# Altium PCB NodeFPGA.PcbDoc
Units mm, origin at the board's own origin, x right, y up, seen from the top; angles counter-clockwise.
Board outline 25.4 x 47.62 mm, 2 copper layers (Top Layer, Bottom Layer), stack 1.671 mm thick; 58 components, 71 nets, 271 pads, 99 vias.
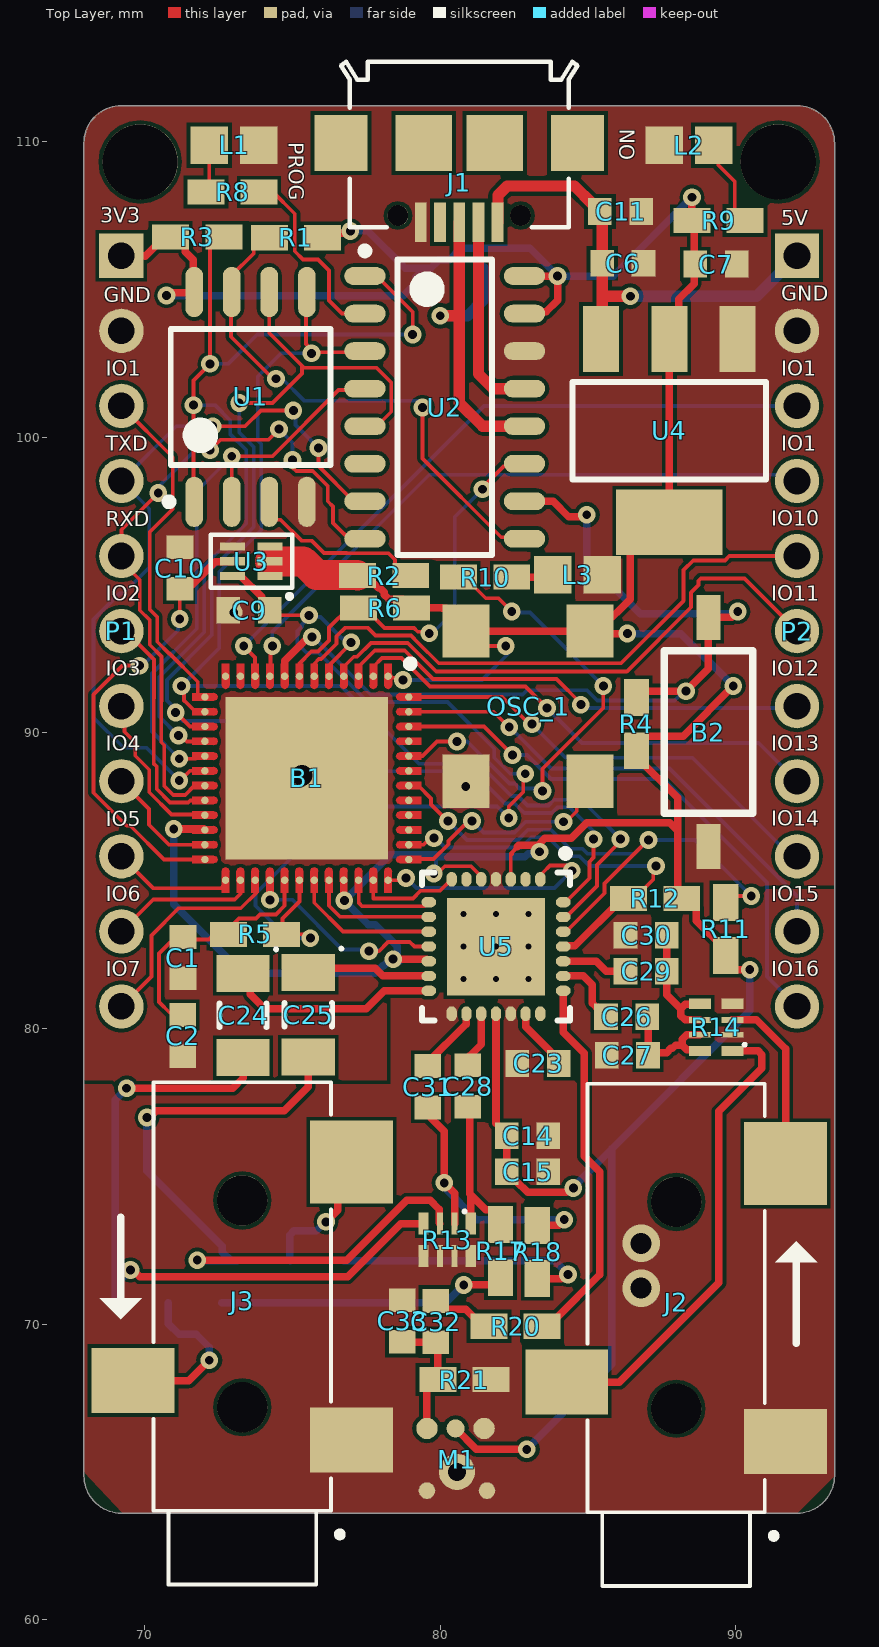
[diagram p0: Top Layer view]
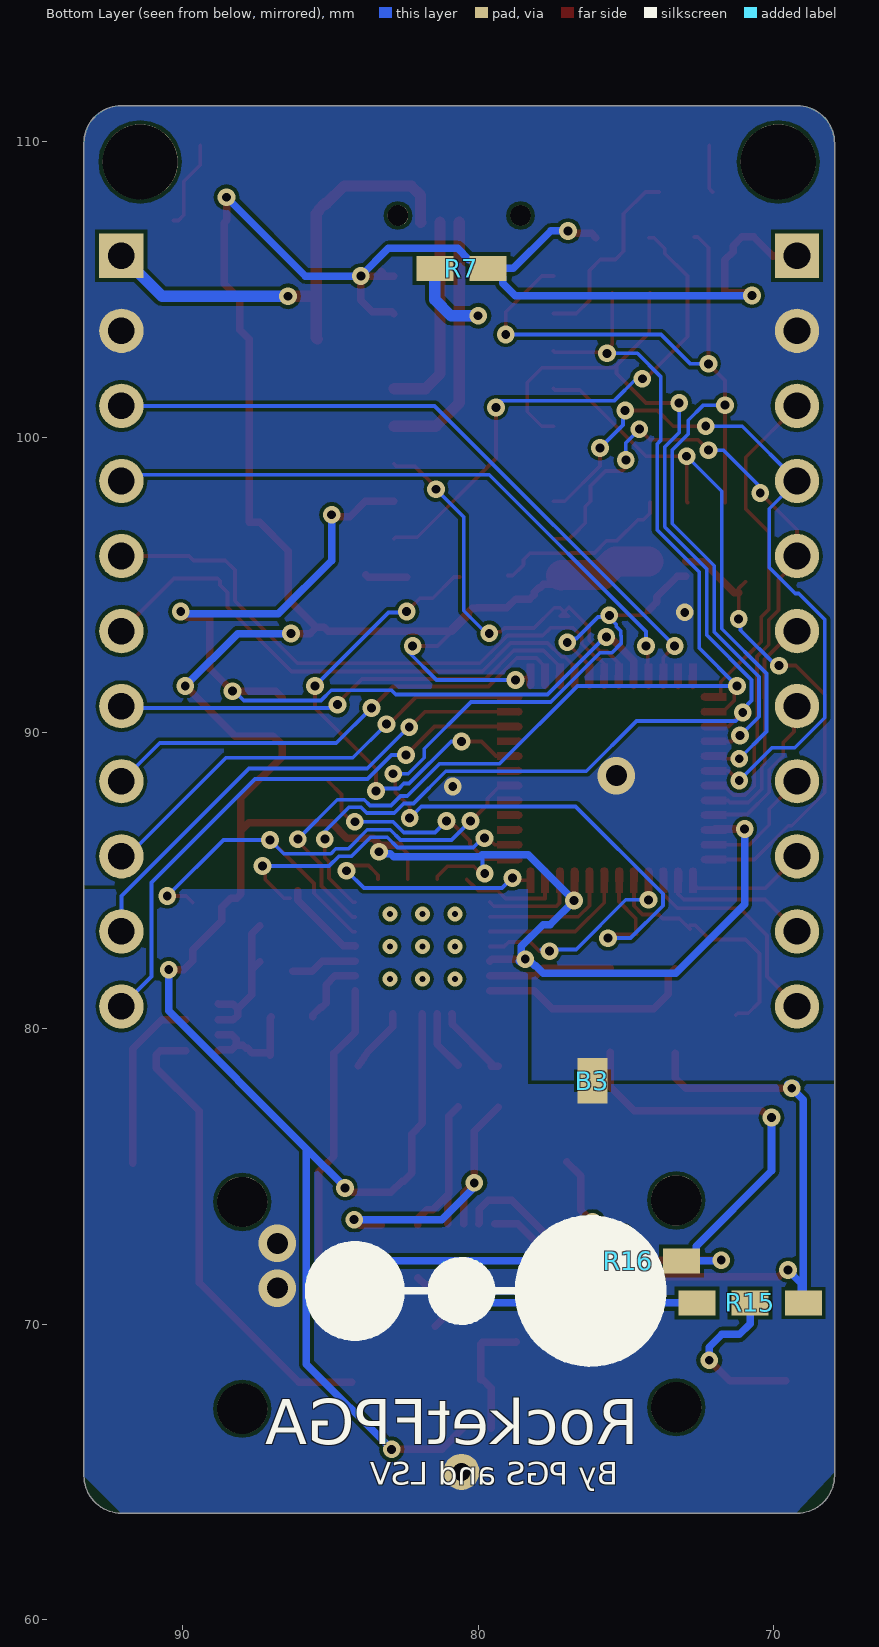
[diagram p1: Bottom Layer view, seen from below]
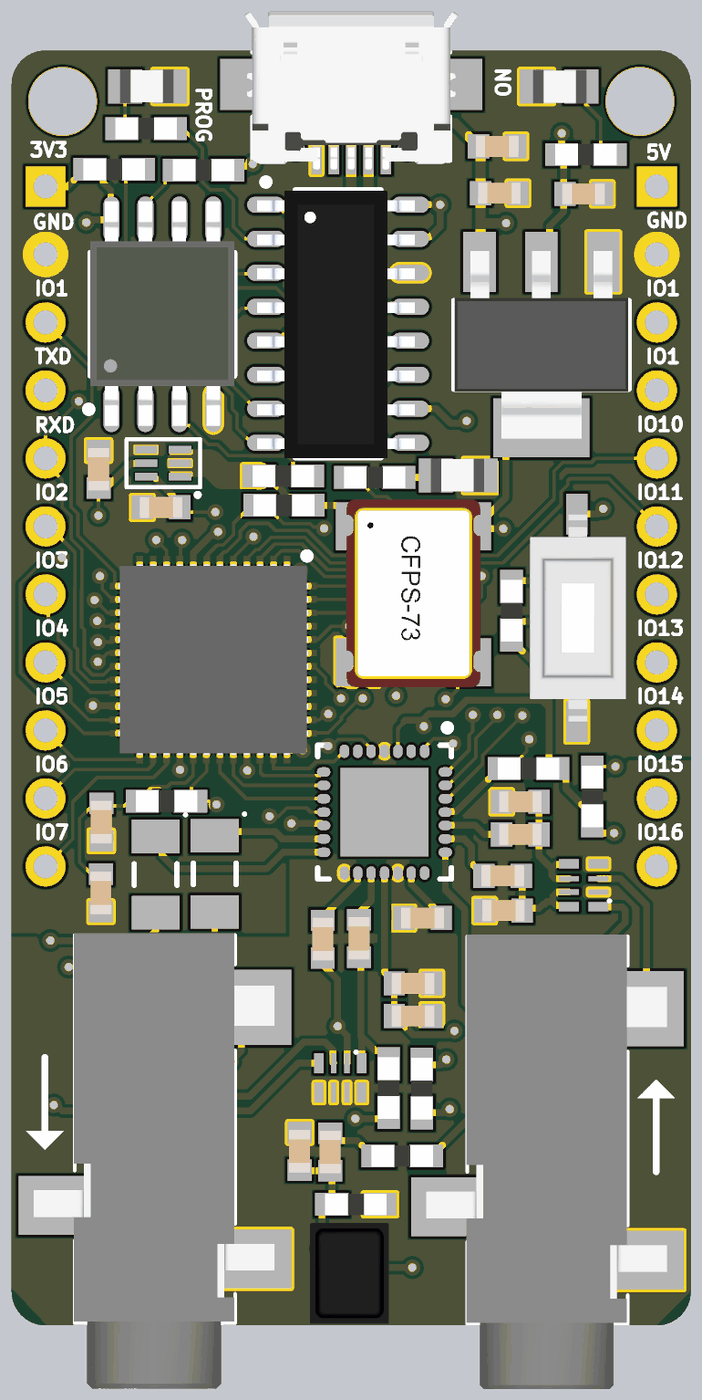
[diagram p2: 3D render of the assembled board from above, using the file's embedded part models]

## Layer stack, top to bottom
Top Solder: solder mask 0.0102, Solder Resist, Dk 3.5
Top Layer: signal copper 0.0356
Dielectric 1: dielectric 1.6, FR-4, Dk 4.8
Bottom Layer: signal copper 0.0356
Bottom Solder: solder mask 0.0102, Solder Resist, Dk 3.5

## Board outline
69.215,63.602 cw(c69.215,64.872) 67.945,64.872 67.945,109.957 cw(c69.215,109.957) 69.215,111.227 92.075,111.227 cw(c92.075,109.957) 93.345,109.957 93.345,64.872 cw(c92.075,64.872) 92.075,63.602

## Design rules (kind name [scope] priority, off if disabled: settings)
Clearance [All] p1: gap=0.127 ignorepadtopadclearanceinfootprint=FALSE except(0: Arc-Hole Track-Hole SMDPad-Hole THPad-Hole Via-Hole Fill-Hole Poly-Hole Region-Hole Text-Hole; 0.076: SMDPad-SMDPad)
DiffPairsRouting [All] p1: maxlimit=0.254 minlimit=0.254 mostfreqgap=0.254 toplayer_minwidth=0.381 toplayer_maxwidth=0.381 toplayer_prefwidth=0.381 bottomlayer_minwidth=0.381 bottomlayer_maxwidth=0.381 bottomlayer_prefwidth=0.381 maxuncoupledlength=12.7
MinimumSolderMaskSliver [All] p1: minsoldermaskwidth=0
PolygonConnect [All] p1: connectstyle=Direct reliefconductorwidth=0.254 reliefentries=4 polygonreliefangle="90 Angle" airgapwidth=0.254
RoutingVias [All] p1: holewidth=0.3 width=0.6 viastyle="Through Hole" minholewidth=0.3 minwidth=0.6 maxholewidth=1.27 maxwidth=1.27
SilkToSolderMaskClearance [IsPad] p1: minsilkscreentomaskgap=0 clearancetoexposedcopper=TRUE
SolderMaskExpansion [All] p1: expansion=0.102
Width [All] p1: maxlimit=1.016 minlimit=0.127 preferedwidth=0.254 minimp=50.000000 maximp=50.000000 favimp=50.000000
27 further rules are at their usual default settings.

## Classes and differential pairs
component class 04_AudioCodec: B3 C14 C15 C23 C24 C25 C26 C27 C28 C29 C30 C31 C32 C33 J2 J3 M1 R11 R12 R13 R14 R15 R16 R17 R18 R20 R21 U5
component class 02_USB_MCU: C6 C7 J1 R6 R7 U2
component class 01_FPGA_FlashMem: B1 B2 C1 C2 OSC_1 R1 R2 R3 R4 R5 U1
component class 03_Power_IO: C9 C10 C11 L1 L2 L3 P1 P2 R8 R9 R10 U3 U4
differential pair USB_D: +USB_D_P -USB_D_N

## Components (designator, comment, footprint, x,y, rotation, side; value= is the part's Value field where it differs from the comment)
B1 "ICE40UP5K-SG48ITR" QFN50P700X700X100-49N-D 75.489,88.468 r270 top
B2 "FSM6JH" SMD_PUSHBUTTON_3x6x2mm5 89.078,92.407 r270 top
B3 "GND bridge" GND_BRIDGE 76.138,77.978 r90 bottom net-tie
C1 "Ceramic capacitor" "0603 CAP" 71.298,82.398 r90 top value=100nF
C2 "Ceramic capacitor" "0603 CAP" 71.285,79.756 r90 top value=1uF
C6 "Ceramic capacitor" "0603 CAP" 86.182,105.893 r0 top value=100nF
C7 "Ceramic capacitor" "0603 CAP" 89.332,105.867 r0 top value=100nF
C9 "Ceramic capacitor" "0603 CAP" 73.533,94.158 r180 top value=1uF
C10 "Ceramic capacitor" "0603 CAP" 71.196,95.58 r90 top value=100nF
C11 "Ceramic capacitor" "0603 CAP" 86.106,107.645 r0 top value=1uF
C14 "Ceramic capacitor" "0603 CAP" 82.956,76.378 r0 top value=100nF
C15 "Ceramic capacitor" "0603 CAP" 82.956,75.159 r0 top value=1uF
C23 "Ceramic capacitor" "0603 CAP" 83.312,78.816 r180 top value=1uF
C24 "Capacitor Electrolitic" CAPCP3216X16N 73.33,80.442 r270 top value=220uF
C25 "Capacitor Electrolitic" CAPCP3216X16N 75.54,80.467 r270 top value=220uF
C26 "Ceramic capacitor" "0603 CAP" 86.309,80.391 r180 top value=1uF
C27 "Ceramic capacitor" "0603 CAP" 86.335,79.096 r180 top value=220pF
C28 "Ceramic capacitor" "0603 CAP" 80.939,78.054 r270 top value=1uF
C29 "Ceramic capacitor" "0603 CAP" 86.97,81.94 r0 top value=1uF
C30 "Ceramic capacitor" "0603 CAP" 86.97,83.16 r180 top value=220pF
C31 "Ceramic capacitor" "0603 CAP" 79.578,78.029 r270 top value=1uF
C32 "Ceramic capacitor" "0603 CAP" 79.858,70.079 r270 top value=1uF
C33 "Ceramic capacitor" "0603 CAP" 78.715,70.104 r90 top value=1uF
J1 "Micro USB 2.0 Type B" 629105136821 80.645,109.957 r180 top
J2 "SJ-3523-SMT-TR" CUI_SJ-3523-SMT-TR 87.986,67.132 r90 top
J3 "SJ-3523-SMT-TR" CUI_SJ-3523-SMT-TR 73.304,67.183 r90 top
L1 "LED_SMD" 0805 72.923,109.88 r0 top
L2 "LED_SMD" 0805 88.519,109.88 r180 top
L3 "LED_SMD" 0805 84.542,95.352 r0 top
M1 "SPU0410LR5H-1" SPU0410LR5H-1 79.554,66.468 r0 top
OSC_1 "Canned Oscilator" "Canned Oscilator" 80.874,93.447 r270 top value=49.152MHz
P1 "Header 11" HDR1X11 69.215,106.147 r270 top
P2 "Header 11" HDR1X11 92.075,106.147 r270 top
R1 "Resistor" "Resistencia 0603" 75.122,106.756 r0 top value=10k
R2 "Resistor" "Resistencia 0603" 78.105,95.326 r180 top value=10k
R3 "Resistor" "Resistencia 0603" 71.78,106.782 r180 top value=10k
R4 "Resistor" "Resistencia 0603" 86.639,90.297 r270 top value=10k
R5 "Resistor" "Resistencia 0603" 73.736,83.185 r0 top value=120
R6 "Resistor" "Resistencia 0603" 78.13,94.234 r0 top value=10k
R7 "Resistor" "Resistencia 0603" 80.569,105.715 r180 bottom value=10k
R8 "Resistor" "Resistencia 0603" 72.974,108.306 r0 top value=120
R9 "Resistor" "Resistencia 0603" 89.419,107.34 r180 top value=120
R10 "Resistor" "Resistencia 0603" 81.523,95.275 r180 top value=120
R11 "Resistor" "Resistencia 0603" 89.662,83.363 r270 top value=10k
R12 "Resistor" "Resistencia 0603" 87.274,84.404 r0 top value=10k
R13 "Resistor array" ResistorArray_0804 80.239,72.847 r270 top value=47k
R14 "Resistor array" ResistorArray_0804 89.341,80.039 r180 top value=5k6
R15 "Selection resistor" SelectionResistor 69.901,70.714 r0 bottom
R16 "Selection resistor" SelectionResistor 74.03,72.136 r0 bottom
R17 "Resistor" "Resistencia 0603" 82.042,72.466 r270 top value=120
R18 "Resistor" "Resistencia 0603" 83.287,72.441 r270 top value=120
R20 "Resistor" "Resistencia 0603" 82.55,69.926 r0 top value=10k
R21 "Resistor" "Resistencia 0603" 80.823,68.123 r180 top value=47k
U1 "W25Q32JV" W25Q32J 73.558,101.346 r90 top
U2 "CH551G" CH551 80.155,101.016 r0 top
U3 "1V2 and 2V5 dual regulator" "DSE 6" 74.244,95.309 r180 top
U4 "KIA1117-3.3" SOT-223 87.757,100.228 r180 top
U5 "WM8731" WM8731 81.89,82.774 r270 top

## Footprints (in the part's own frame and the unit in brackets; to place one, negate y for a bottom-side part, rotate by r counter-clockwise, add the part's x,y. Pads: shape width x height; smd on the part's side, far side on the other; paste and mask are expansions set on the pad)
"0603 CAP" [mm] "Chip Capacitor, Body 1.6x0.8mm, IPC High Density"
  rect 0.8x0.9 smd: 1(-0.7,0) 2(0.7,0)
  body extent -0.8,-0.4 0.8,0.4, height 0.78
0805 [mil]
  rect 50x50 smd: 1(-29,0) 2(37,0)
  body extent -36,-25 42,25, height 17
629105136821 [mm] "Micro USB 2.0 SMT Type B Horizontal 5 Contacts"
  rect 0.4x1.35 smd: 1(-1.3,2.675) 2(-0.65,2.675) 3(0,2.675) 4(0.65,2.675) 5(1.3,2.675)
  round 0.7 hole 0.7 unplated: M1(-2.075,2.45) M2(2.075,2.45)
  rect 1.8x1.9 smd: S1(-4,0) S4(4,0)
  rect 1.9x1.9 smd: S2(-1.2,0) S3(1.2,0)
  silkscreen extent -4,-2.75 4,2.85, body extent -4,-2.73 4,3.17, height 2.77
"Canned Oscilator" [mm]
  rect 1.8x1.6 smd: 1(0,0) 2(5.08,0) 3(5.08,4.2) 4(0,4.2)
  body extent -1,-0.41 6,4.61, height 1.52
CAPCP3216X16N [mm] "Chip Capacitor, 2-Leads, Body 3.20x1.60mm, IPC Medium Density"
  rect 1.25x1.8 smd: 1(-1.425,0) 2(1.425,0)
  silkscreen extent -2.29,-0.8 0.4,1.17, body extent -1.7,-0.9 1.7,0.9, height 1.6
CH551 [mm] "MCU"
  oval 1.4x0.6 smd: 1(-2.7,4.445) 2(-2.7,3.175) 3(-2.7,1.905) 4(-2.7,0.635) 5(-2.7,-0.635) 6(-2.7,-1.905) 7(-2.7,-3.175) 8(-2.7,-4.445) 9(2.7,-4.445) 10(2.7,-3.175) 11(2.7,-1.905) 12(2.7,-0.635) 13(2.7,0.635) 14(2.7,1.905) 15(2.7,3.175) 16(2.7,4.445)
  silkscreen extent -2.82,-5 1.6,5.42, body extent -6.76,-5.02 2.87,7.52, height 1.45
CUI_SJ-3523-SMT-TR [mm] "mini jack"
  rect 2.2x2.8 smd: 1(-1.1,-3.7) 3(0.9,3.7)
  rect 2.8x2.8 smd: 2(8.3,-3.7)
  round 1.7 hole 1.7 unplated: None(0,0) None(7,0)
  silkscreen extent -6,-3.4 11,3, body extent -5.93,-4.47 11.07,4.53, height 5
"DSE 6" [mm] "DSE PACKAGE"
  rect 0.85x0.28 smd mask+0.05: 1(0,0) 2(0,-0.5) 3(0,-1) 4(1.27,-1) 5(1.27,-0.5) 6(1.27,0)
  silkscreen extent -0.75,-1.4 2,0.71, body extent -0.53,-1.24 1.85,0.25, height 0.8
GND_BRIDGE [mil] "GND_BRIDGE"
  rect 40x40 smd: 1(0,0) 2(20,0)
HDR1X11 [mm] "Connector; Header; 11 Position"
  rect 1.5x1.5 hole 0.9: 1(0,0)
  round 1.5 hole 0.9: 2(2.54,0) 3(5.08,0) 4(7.62,0) 5(10.16,0) 6(12.7,0) 7(15.24,0) 8(17.78,0) 9(20.32,0) 10(22.86,0) 11(25.4,0)
QFN50P700X700X100-49N-D [mm]
  round 0.25 smd: 1(-3.45,2.75) 2(-3.45,2.25) 3(-3.45,1.75) 4(-3.45,1.25) 5(-3.45,0.75) 6(-3.45,0.25) 7(-3.45,-0.25) 8(-3.45,-0.75) 9(-3.45,-1.25) 10(-3.45,-1.75) 11(-3.45,-2.25) 12(-3.45,-2.75) 13(-2.75,-3.45) 14(-2.25,-3.45) 15(-1.75,-3.45) 16(-1.25,-3.45) 17(-0.75,-3.45) 18(-0.25,-3.45) 19(0.25,-3.45) 20(0.75,-3.45) 21(1.25,-3.45) 22(1.75,-3.45) 23(2.25,-3.45) 24(2.75,-3.45) 25(3.45,-2.75) 26(3.45,-2.25) 27(3.45,-1.75) 28(3.45,-1.25) 29(3.45,-0.75) 30(3.45,-0.25) 31(3.45,0.25) 32(3.45,0.75) 33(3.45,1.25) 34(3.45,1.75) 35(3.45,2.25) 36(3.45,2.75) 37(2.75,3.45) 38(2.25,3.45) 39(1.75,3.45) 40(1.25,3.45) 41(0.75,3.45) 42(0.25,3.45) 43(-0.25,3.45) 44(-0.75,3.45) 45(-1.25,3.45) 46(-1.75,3.45) 47(-2.25,3.45) 48(-2.75,3.45)
  rrect0% 5.5x5.5 smd: 49(0,0)
  Top Layer region: 3.875,-0.383 3.15,-0.393 3.054,-0.354 3.015,-0.258 3.054,-0.162 3.152,-0.122 3.875,-0.132
  Top Layer region: -2.625,3.875 -2.615,3.15 -2.654,3.054 -2.75,3.015 -2.846,3.054 -2.885,3.15 -2.875,3.15 -2.875,3.875 -2.625,3.875
  Top Layer region: -2.125,3.875 -2.115,3.15 -2.154,3.054 -2.25,3.015 -2.346,3.054 -2.385,3.15 -2.375,3.15 -2.375,3.875 -2.125,3.875
  Top Layer region: -1.625,3.875 -1.615,3.15 -1.654,3.054 -1.75,3.015 -1.846,3.054 -1.885,3.15 -1.875,3.15 -1.875,3.875 -1.625,3.875
  Top Layer region: -1.125,3.875 -1.115,3.15 -1.154,3.054 -1.25,3.015 -1.346,3.054 -1.385,3.15 -1.375,3.15 -1.375,3.875 -1.125,3.875
  Top Layer region: -0.625,3.875 -0.615,3.15 -0.654,3.054 -0.75,3.015 -0.846,3.054 -0.885,3.15 -0.875,3.15 -0.875,3.875 -0.625,3.875
  Top Layer region: -0.125,3.875 -0.115,3.15 -0.154,3.054 -0.25,3.015 -0.346,3.054 -0.385,3.15 -0.375,3.15 -0.375,3.875 -0.125,3.875
  Top Layer region: 0.375,3.875 0.385,3.15 0.346,3.054 0.25,3.015 0.154,3.054 0.115,3.15 0.125,3.15 0.125,3.875 0.375,3.875
  Top Layer region: 0.875,3.875 0.885,3.15 0.846,3.054 0.75,3.015 0.654,3.054 0.615,3.15 0.625,3.15 0.625,3.875 0.875,3.875
  Top Layer region: 1.375,3.875 1.385,3.15 1.346,3.054 1.25,3.015 1.154,3.054 1.115,3.15 1.125,3.15 1.125,3.875 1.375,3.875
  Top Layer region: 1.875,3.875 1.885,3.15 1.846,3.054 1.75,3.015 1.654,3.054 1.615,3.15 1.625,3.15 1.625,3.875 1.875,3.875
  Top Layer region: 2.375,3.875 2.385,3.15 2.346,3.054 2.25,3.015 2.154,3.054 2.115,3.15 2.125,3.15 2.125,3.875 2.375,3.875
  Top Layer region: 2.875,3.875 2.885,3.15 2.846,3.054 2.75,3.015 2.654,3.054 2.615,3.15 2.625,3.15 2.625,3.875 2.875,3.875
  Top Layer region: 3.875,2.625 3.15,2.615 3.054,2.654 3.015,2.75 3.054,2.846 3.15,2.885 3.15,2.875 3.875,2.875 3.875,2.625
  Top Layer region: 3.875,2.125 3.15,2.115 3.054,2.154 3.015,2.25 3.054,2.346 3.15,2.385 3.15,2.375 3.875,2.375 3.875,2.125
  Top Layer region: 3.875,1.625 3.15,1.615 3.054,1.654 3.015,1.75 3.054,1.846 3.15,1.885 3.15,1.875 3.875,1.875 3.875,1.625
  Top Layer region: 3.875,1.125 3.15,1.115 3.054,1.154 3.015,1.25 3.054,1.346 3.15,1.385 3.15,1.375 3.875,1.375 3.875,1.125
  Top Layer region: 3.875,0.625 3.15,0.615 3.054,0.654 3.015,0.75 3.054,0.846 3.15,0.885 3.15,0.875 3.875,0.875 3.875,0.625
  Top Layer region: 3.875,0.125 3.15,0.115 3.054,0.154 3.015,0.25 3.054,0.346 3.15,0.385 3.15,0.375 3.875,0.375 3.875,0.125
  Top Layer region: 3.875,-0.875 3.15,-0.885 3.054,-0.846 3.015,-0.75 3.054,-0.654 3.15,-0.615 3.15,-0.625 3.875,-0.625 3.875,-0.875
  Top Layer region: 3.875,-1.375 3.15,-1.385 3.054,-1.346 3.015,-1.25 3.054,-1.154 3.15,-1.115 3.15,-1.125 3.875,-1.125 3.875,-1.375
  Top Layer region: 3.875,-1.875 3.15,-1.885 3.054,-1.846 3.015,-1.75 3.054,-1.654 3.15,-1.615 3.15,-1.625 3.875,-1.625 3.875,-1.875
  Top Layer region: 3.875,-2.375 3.15,-2.385 3.054,-2.346 3.015,-2.25 3.054,-2.154 3.15,-2.115 3.15,-2.125 3.875,-2.125 3.875,-2.375
  Top Layer region: 3.875,-2.875 3.15,-2.885 3.054,-2.846 3.015,-2.75 3.054,-2.654 3.15,-2.615 3.15,-2.625 3.875,-2.625 3.875,-2.875
  Top Layer region: 2.625,-3.875 2.615,-3.15 2.654,-3.054 2.75,-3.015 2.846,-3.054 2.885,-3.15 2.875,-3.15 2.875,-3.875 2.625,-3.875
  Top Layer region: 2.125,-3.875 2.115,-3.15 2.154,-3.054 2.25,-3.015 2.346,-3.054 2.385,-3.15 2.375,-3.15 2.375,-3.875 2.125,-3.875
  Top Layer region: 1.625,-3.875 1.615,-3.15 1.654,-3.054 1.75,-3.015 1.846,-3.054 1.885,-3.15 1.875,-3.15 1.875,-3.875 1.625,-3.875
  Top Layer region: 1.125,-3.875 1.115,-3.15 1.154,-3.054 1.25,-3.015 1.346,-3.054 1.385,-3.15 1.375,-3.15 1.375,-3.875 1.125,-3.875
  Top Layer region: 0.625,-3.875 0.615,-3.15 0.654,-3.054 0.75,-3.015 0.846,-3.054 0.885,-3.15 0.875,-3.15 0.875,-3.875 0.625,-3.875
  Top Layer region: 0.125,-3.875 0.115,-3.15 0.154,-3.054 0.25,-3.015 0.346,-3.054 0.385,-3.15 0.375,-3.15 0.375,-3.875 0.125,-3.875
  Top Layer region: -0.375,-3.875 -0.385,-3.15 -0.346,-3.054 -0.25,-3.015 -0.154,-3.054 -0.115,-3.15 -0.125,-3.15 -0.125,-3.875 -0.375,-3.875
  Top Layer region: -0.875,-3.875 -0.885,-3.15 -0.846,-3.054 -0.75,-3.015 -0.654,-3.054 -0.615,-3.15 -0.625,-3.15 -0.625,-3.875 -0.875,-3.875
  Top Layer region: -1.375,-3.875 -1.385,-3.15 -1.346,-3.054 -1.25,-3.015 -1.154,-3.054 -1.115,-3.15 -1.125,-3.15 -1.125,-3.875 -1.375,-3.875
  Top Layer region: -1.875,-3.875 -1.885,-3.15 -1.846,-3.054 -1.75,-3.015 -1.654,-3.054 -1.615,-3.15 -1.625,-3.15 -1.625,-3.875 -1.875,-3.875
  Top Layer region: -2.375,-3.875 -2.385,-3.15 -2.346,-3.054 -2.25,-3.015 -2.154,-3.054 -2.115,-3.15 -2.125,-3.15 -2.125,-3.875 -2.375,-3.875
  Top Layer region: -2.875,-3.875 -2.885,-3.15 -2.846,-3.054 -2.75,-3.015 -2.654,-3.054 -2.615,-3.15 -2.625,-3.15 -2.625,-3.875 -2.875,-3.875
  Top Layer region: -3.875,-2.625 -3.15,-2.615 -3.054,-2.654 -3.015,-2.75 -3.054,-2.846 -3.15,-2.885 -3.15,-2.875 -3.875,-2.875 -3.875,-2.625
  Top Layer region: -3.875,-2.125 -3.15,-2.115 -3.054,-2.154 -3.015,-2.25 -3.054,-2.346 -3.15,-2.385 -3.15,-2.375 -3.875,-2.375 -3.875,-2.125
  Top Layer region: -3.875,-1.625 -3.15,-1.615 -3.054,-1.654 -3.015,-1.75 -3.054,-1.846 -3.15,-1.885 -3.15,-1.875 -3.875,-1.875 -3.875,-1.625
  Top Layer region: -3.875,-1.125 -3.15,-1.115 -3.054,-1.154 -3.015,-1.25 -3.054,-1.346 -3.15,-1.385 -3.15,-1.375 -3.875,-1.375 -3.875,-1.125
  Top Layer region: -3.875,-0.625 -3.15,-0.615 -3.054,-0.654 -3.015,-0.75 -3.054,-0.846 -3.15,-0.885 -3.15,-0.875 -3.875,-0.875 -3.875,-0.625
  Top Layer region: -3.875,-0.125 -3.15,-0.115 -3.054,-0.154 -3.015,-0.25 -3.054,-0.346 -3.15,-0.385 -3.15,-0.375 -3.875,-0.375 -3.875,-0.125
  Top Layer region: -3.875,0.375 -3.15,0.385 -3.054,0.346 -3.015,0.25 -3.054,0.154 -3.15,0.115 -3.15,0.125 -3.875,0.125 -3.875,0.375
  Top Layer region: -3.875,0.875 -3.15,0.885 -3.054,0.846 -3.015,0.75 -3.054,0.654 -3.15,0.615 -3.15,0.625 -3.875,0.625 -3.875,0.875
  Top Layer region: -3.875,1.375 -3.15,1.385 -3.054,1.346 -3.015,1.25 -3.054,1.154 -3.15,1.115 -3.15,1.125 -3.875,1.125 -3.875,1.375
  Top Layer region: -3.875,1.875 -3.15,1.885 -3.054,1.846 -3.015,1.75 -3.054,1.654 -3.15,1.615 -3.15,1.625 -3.875,1.625 -3.875,1.875
  Top Layer region: -3.875,2.375 -3.15,2.385 -3.054,2.346 -3.015,2.25 -3.054,2.154 -3.15,2.115 -3.15,2.125 -3.875,2.125 -3.875,2.375
  Top Layer region: -3.875,2.875 -3.15,2.885 -3.054,2.846 -3.015,2.75 -3.054,2.654 -3.15,2.615 -3.15,2.625 -3.875,2.625 -3.875,2.875
  silkscreen extent -4,3.38 -3.75,3.63, body extent -3.55,-3.55 3.55,3.55, height 1
"Resistencia 0603" [mm] "Chip Resistor, 2-Leads, Body 2,30x0,80mm, IPC Medium Density"
  rect 1.25x0.85 smd: 1(-0.9,0) 2(0.9,0)
  body extent -1.15,-0.4 1.15,0.4, height 0.6
ResistorArray_0804 [mm] "ResistorArray_0804"
  rect 0.75x0.35 smd: 1(-0.55,0.8) 4(-0.55,-0.8) 5(0.55,-0.8) 8(0.55,0.8)
  rect 0.75x0.2 smd: 2(-0.55,0.25) 3(-0.55,-0.25) 6(0.55,-0.25) 7(0.55,0.25)
  silkscreen extent -1.01,0.54 -0.91,0.64, body extent -0.55,-1.05 0.55,1.05, height 0.45
SelectionResistor [mm] "3 pin selection resistor 0603"
  rect 1.25x0.85 smd: 1(-0.9,0) 2(0.9,0) 3(2.703,0)
SMD_PUSHBUTTON_3x6x2mm5 [mm]
  rect 1.524x0.8 smd: 1(-1.5,0) 2(6.25,0)
  silkscreen extent -0.38,-1.5 5.12,1.5, body extent -1.5,-1.75 6.27,1.83, height 2.54
SOT-223 [mil]
  rect 48x88 smd: 1(-91,-122) 2(0,-122) 3(91,-122)
  rect 141.73x86.61 smd: 4(0,122.01)
  silkscreen extent -129,-65 129,65, body extent -128,-138 128,138, height 65
SPU0410LR5H-1 [mm] "mems microphone"
  round 0.723 smd: 1(0,0) 5(1.932,0)
  round 0.562 smd: 2(0,-2.103) 3(2.031,-2.103)
  round 0.612 smd: 4(0.966,0)
  round 1.224 hole 0.61 paste-909.217 mask+0.102: 6(1.015,-1.469)
  body extent -0.45,-2.8 2.5,0.96, height 1.13
W25Q32J [mm]
  oval 1.7x0.6 smd: 1(-3.525,1.88) 2(-3.525,0.61) 3(-3.525,-0.66) 4(-3.525,-1.93) 5(3.575,-1.93) 6(3.575,-0.66) 7(3.575,0.61) 8(3.575,1.88)
  silkscreen extent -3.65,-2.73 2.33,2.85, body extent -4.15,-2.72 4.25,2.66, height 2.29
WM8731 [mm] "PQFN, 28-Leads, Body 5.00x5.00mm, Pitch 0.50mm, Thermal Pad 3.30x3.30mm, IPC Medium Density"
  oval 0.5x0.35 smd: 1(-2.275,1.5) 2(-2.275,1) 3(-2.275,0.5) 4(-2.275,0) 5(-2.275,-0.5) 6(-2.275,-1) 7(-2.275,-1.5) 15(2.275,-1.5) 16(2.275,-1) 17(2.275,-0.5) 18(2.275,0) 19(2.275,0.5) 20(2.275,1) 21(2.275,1.5)
  oval 0.35x0.5 smd: 8(-1.5,-2.275) 9(-1,-2.275) 10(-0.5,-2.275) 11(0,-2.275) 12(0.5,-2.275) 13(1,-2.275) 14(1.5,-2.275) 22(1.5,2.275) 23(1,2.275) 24(0.5,2.275) 25(0,2.275) 26(-0.5,2.275) 27(-1,2.275) 28(-1.5,2.275)
  rect 3.3x3.3 smd: 29(0,0)
  silkscreen extent -3.27,-2.5 2.5,2.5, body extent -2.5,-2.5 2.5,2.5, height 1

## Part data
B1: "FPGA - Field Programmable Gate Array iCE40-UltraPlus, 5280 LUTs, 1.2V", Manufacturer_Name=Lattice, Mouser Part Number=842-40UP5KSG48ITR, Datasheet Link=https://componentsearchengine.com/Datasheets/1/ICE40UP5K-SG48ITR.pdf, Geometry.Height=1mm, Manufacturer_Part_Number=ICE40UP5K-SG48ITR, price=5.29, vendor=Mouser, vendorID=842-ICE40UP5K-SG48I
B2: "Button THT Switch", Supplier Part Number 1=506-FSM6JH, price=0.096, Supplier 1=Mouser, vendor=Mouser, vendorID=611-PTS636SL43SMTRLF
B3: library part Bridge
C1 C2 C6 C7 C9 C10 C11 C14 C15 C23 C26 C27 C28 C29 C30 C31 C32: library part Capacitor, "Capacitor", ManufacturerReference=-, Package=0603, Supplier Part Number 1=80-C1206C104K5R, Supplier 1=Mouser, vendor=LCSC
  C1 C6 C7 C10 C14: price=0.0023, vendorID=0603F104M500NT
  C2 C9 C11 C15 C23 C26 C28 C29 C31 C32: price=0.0053, vendorID=CC0603ZRY5V7BB105
  C27 C30: price=0.0035, vendorID=0603B221K500NT
C24 C25: ManufacturerReference=-, Package=1206, Voltage Rating=10V, Author="Jaime Jiménez Ortega", Date=21/05/2009, price=0.38, vendor=Mouser, vendorID=80-T491A224M035
C33: library part Capacitor, "Capacitor", ManufacturerReference=-, Package=220pF, Supplier Part Number 1=80-C1206C104K5R, price=0.0053, Supplier 1=Mouser, vendor=LCSC, vendorID=CC0603ZRY5V7BB105
J1: library part 629105136821, "Micro USB 2.0 Type B Horizontal SMT 5 Contacts WR-COM", Operating Temperature="-40 to 85 degC", Rated Current="1 A", ComponentLink1Description=Manufacturer, ComponentLink1URL=http://www.we-online.de, ComponentLink2Description=Datasheet, ComponentLink2URL=http://katalog.we-online.de/em/datasheet/629105136821.pdf, Gender=Female, Interface Type="Micro USB 2.0 Type B", Mounting Technology=SMT, Orientation=Horizontal, Packaging="Tape and Reel", Part Number=629105136821, price=0.05, Published Date="May 2018", Publisher="Wurth Elektronik", vendor=LCSC, vendorID=C21377
J2 J3: Package=-, ManufacturerReference=SJ-3523-SMT-TR, price=0.777, vendor=Mouser, vendorID=490-SJ-3523-SMT-TR
L1 L2 L3: "LED SMD", Supplier Part Number 1=630-HSMC-C170, price=0.087, Supplier 1=Mouser, vendor=Mouser, vendorID=743-IN-S85AT5B
M1: "MEMS Microphone", ManufacturerReference=SPU0410LR5H-QB, price=0.646, vendor=Mouser, vendorID=721-SPU0410LR5H-QB
OSC_1: "Canned Oscilator -LFSPXO019116BULK", ManualRef=449-LFSPXO019116BULK, price=1.18, vendor=Mouser, vendorID=774-CB3LV-3C-49M1
P1 P2: library part "Header 11_1", "Header, 11-Pin", LatestRevisionDate=17-Jul-2002, LatestRevisionNote="Re-released for DXP Platform.", price=0.18, Publisher="Altium Limited", vendor=LCSC, vendorID=A2541WV-11P
R1 R2 R3 R4 R5 R6 R7 R11 R12 R17 R18 R20 R21: ManufacturerReference=-, Package=0603, Supplier Part Number 1=2358436, Supplier 1=Farnell, vendor=LCSC
  R1 R2 R3 R4 R6 R7 R11 R12 R20: price=0.0009, vendorID=0603WAF1002T5E
  R5: price=0.0024, vendor2=vendor, vendorID=CR0603FA1200G
  R17 R18: price=0.0024, vendorID=CR0603FA1200G
  R21: price=0.0007, vendorID=RS-03K473JT
R8 R9 R10: Supplier Part Number 1=2358436, price=0.0024, Supplier 1=Farnell, vendor=LCSC, vendor2=vendor, vendorID=CR0603FA1200G
R13: library part ResistorArray_4, "4 resistors in smd array configuration", ManufacturerReference=TC164-FR-0747KL, Package=-, price=0.201, vendor=Mouser, vendorID=603-TC164-FR-0747KL
R14: library part ResistorArray_4, "4 resistors in smd array configuration", ManufacturerReference=TC164-FR-075K6L, Package=-, price=0.201, vendor=Mouser, vendorID=603-TC164-FR-075K6L
R15 R16: library part SelectionResistor
U1: "32M-BIT SERIAL FLASH MEMORY WITH DUAL AND QUAD SPI", ManufacturerReference=W25Q32J, Package=SOIC-8, price=0.603, vendor=Mouser, vendorID=454-W25Q32JVSSIQ
U2: "Microcontroller wUSB support", Package=SOP-16, ComponentLink1Description=LCSC, ComponentLink1URL=https://lcsc.com/product-detail/USB_CH551G_C108958.html, ManufacturerRefenrece=CH551G, price=0.3, vendor=LCSC, vendorID=C108958
U3: library part TLV7111225DSER, ManufacturerReference=TLV7111, Package="WSON 6", Supplier Part Number 1=TLV7111225DSER**MULT1, price=0.489, Supplier 1=Arrow, vendor=Mouser, vendorID=595-TLV7111225DSER
U4: "5V to 3.3V 800mA Low-Dropout Linear Regulator", Package=SOT-223, ManufacturerReference=KIA1117-3.3, price=0.05, vendor=LCSC, vendorID=C116069
U5: "Portable Internet Audio CODEC with Headphone Driver  and Programmable Sample Rates", Package="PQFN 28 Leads", ManufacturerReference=WM8731, price=3.18, vendor=Mouser, vendorID=238-WM8731CLSEFL

## Free pads (board coordinates)
  round 2.54 hole 2.54: 3(69.85,109.322) 3(91.44,109.322)

## Via types
v1: diameter 0.6, hole 0.3, Top Layer to Bottom Layer, tented both sides, 87 vias
v2: diameter 0.5, hole 0.2, Top Layer to Bottom Layer, 9 vias
v3: diameter 1.27, hole 0.711, Top Layer to Bottom Layer, tented both sides, 3 vias

## Nets (pads, with @x,y where several pads share a name; then routed paths per layer and width w, separated by ;. In a path a pad name is that pad's centre, name@x,y a point inside that pad or via, vN(x,y) a via of type N, cw(c..) or ccw(c..) an arc to the next point about the centre after c; other vN are vias at no path point)
1V2: B1.5 B1.30 C9.1 R5.2 U3.6 | length 34.8
  Top Layer w0.127: C9.1 74.411,93.98 v1(75.565,93.98) ; B1.30 75.239,84.295 74.67,83.726 74.67,83.219 R5.2 75.449,83.185 75.576,83.058 v1(75.609,83.058) ; B1.5 76.239,92.284 76.987,93.032 v1(76.987,93.066) ; v1(82.321,87.122) 82.321,87.511 82.813,88.002 82.813,88.553 v1(82.88,88.621)
  Top Layer w0.254: U3.6 73.259,95.309 73.96,94.608 73.96,94.431 C9.1
  Bottom Layer w0.127: v1@75.565,93.906 75.329,93.669 75.329,93.599 75.176,93.447 75.176,93.293 75.166,93.284 75.166,93.03 75.48,92.717 75.883,92.717 77.548,91.051 80.246,91.051 81.831,89.467 81.831,89.159 82.369,88.621 v1(82.88,88.621) ; v1(75.565,93.98) 75.62,93.925 75.95,93.925 76.679,93.197 76.728,93.197 76.859,93.066 v1(76.987,93.066) ; v1(75.609,83.058) 74.846,83.058 73.754,84.15 73.754,84.557 76.708,87.511 81.933,87.511 v1(82.321,87.122)
2V5: B1.24 C10.1 U3.5 | length 15.8
  Top Layer w0.127: v1(69.825,92.278) 69.257,92.278 68.274,91.296 68.274,87.977 69.392,86.859 69.512,86.859 70.653,85.718 B1.24 ; C10.1@70.961,95.115 C10.1@71.19,94.886 ; v1(71.19,93.853) 71.19,94.742 C10.1@71.19,94.886 ; C10.1 C10.1@71.19,94.886
  Top Layer w0.254: C10.1@71.19,94.742 71.343,94.742 72.396,95.796 72.961,95.796 U3.5
  Bottom Layer w0.127: v1(69.825,92.278) 69.926,92.278 71.126,93.478 71.126,93.789 v1(71.19,93.853)
3V3: B1.1 B1.22 B1.33 C7.1 C14.1 C15.1 M1.4 OSC_1.1 OSC_1.4 P1.1 R1.2 R2.2 R3.2 R4.2 R6.2 R7.2 R9.2 R11.2 R12.2 U1.8 U2.15 U2.16 U3.1 U3.2 U3.3 U4.2 U4.4 U5.3 U5.5 U5.12 U5.18 | length 154.1
  Top Layer w0.127: B1.1 78.262,91.895 78.349,91.895 78.374,91.87 78.666,91.87 v1(78.74,91.796) ; v1(79.781,85.242) 79.909,85.242 80.156,85.489 81.041,85.489 81.39,85.141 U5.5 ; OSC_1.1 81.382,92.939 v1(82.22,92.939) ; U5.3@82.39,85.054 82.39,85.856 ; 82.59,86.106 82.427,85.944 82.427,85.894 82.39,85.856 ; 82.615,86.157 82.39,85.931 82.39,85.856
  Top Layer w0.254: P1.1 70.028,106.147 70.028,106.129 70.68,106.782 R3.2 71.08,106.782 71.378,106.484 71.378,106.284 71.653,106.009 71.653,104.896 70.835,104.896 v1(70.739,104.8) ; v1(70.988,86.75) 72.007,86.75 B1.22 ; R1.2 76.168,106.902 76.879,106.902 v1(76.962,106.985) ; v1@76.658,84.185 76.759,84.286 v1(76.759,84.328) 76.739,84.348 v1@76.739,84.593 ; R2.2 77.503,95.028 77.794,95.028 77.909,94.913 77.961,94.913 78.109,94.764 78.109,94.681 78.258,94.532 78.732,94.532 R6.2 80.052,94.234 80.066,94.22 80.201,94.22 80.874,93.547 OSC_1.1 ; v1(78.41,82.347) 78.412,82.345 79.544,82.345 U5.12 ; OSC_1.1@80.34,93.98 OSC_1.1 ; M1.4 81.227,65.761 v1(82.931,65.761) ; U5.18@81.89,80.504 U5.18 81.89,76.795 82.256,76.428 C14.1 C15.1 82.256,75.109 82.529,74.836 82.579,74.836 82.96,74.455 84.267,74.455 84.412,74.6 v1(84.506,74.6) ; 82.615,86.157 82.665,86.207 v1@83.312,86.207 ; U2.15 82.921,104.257 83.581,104.257 83.972,104.648 v1(83.972,105.461) U2.16@83.123,105.461 ; U2.16 U2.16@83.123,105.461 ; U2.16@83.282,105.621 U2.16@83.123,105.461 ; v1(83.363,85.979) 83.312,86.03 v1@83.312,86.207 ; v1(86.335,93.363) 85.693,93.363 OSC_1.4@85.477,93.579 ; v1(88.519,108.128) R9.2 88.595,107.264 88.595,105.207 88.065,104.677 88.065,103.636 U4.2 U4.4 87.398,97.129 86.425,96.156 86.425,94.527 OSC_1.4@85.477,93.579 ; v1(89.916,91.592) 88.219,89.895 86.937,89.895 86.639,89.597 R4.2 86.639,89.197 88.036,87.8 88.036,86.69 ; v1(90.475,81.99) 89.96,81.99 89.662,82.288 R11.2 89.662,82.663 88.672,83.652 88.672,84.106 88.374,84.404 R12.2 88.036,84.542 88.036,86.69 ; OSC_1.1 OSC_1.4 85.206,93.579 OSC_1.4@85.477,93.579 ; v1@83.312,86.207 83.546,86.441 84.443,86.441 84.962,86.96 87.767,86.96 88.036,86.69
  Top Layer w1.016: U3.2 75.362,95.809 75.819,95.352 77.18,95.352 R2.2
  Bottom Layer w0.127: v1(78.74,91.796) 81.415,91.796 82.336,92.717 82.22,92.833 v1(82.22,92.939) ; v1(79.781,85.242) 79.858,85.319 79.858,85.886
  Bottom Layer w0.254: v1(70.739,104.8) 78.754,104.8 79.171,105.217 79.171,105.417 R7.2@79.469,105.715 ; v1(70.988,86.75) 70.988,84.203 73.314,81.876 77.804,81.876 78.05,82.123 78.091,82.123 78.202,82.234 78.568,82.234 78.613,82.279 78.547,82.345 78.547,82.776 77.804,83.519 77.568,83.519 v1(76.759,84.328) 78.317,85.886 79.858,85.886 79.938,85.806 82.866,85.806 82.973,85.913 83.297,85.913 v1(83.363,85.979) ; v1(76.962,106.985) 77.546,106.985 78.812,105.719 79.664,105.719 R7.2 79.967,106.013 80.318,106.013 80.699,106.394 83.039,106.394 v1(83.972,105.461) 85.852,105.461 v1(88.519,108.128) ; v1(82.931,65.761) 85.814,68.644 85.814,75.933 ; v1(84.506,74.6) 84.506,74.625 85.814,75.933 ; v1(86.335,93.363) 88.145,93.363 v1(89.916,91.592) ; v1(90.475,81.99) 90.475,80.594 85.814,75.933
5V: C6.1 C11.1 J1.1 P2.1 U4.3 | length 16.4
  Top Layer w0.381: J1.1 81.954,107.291 81.954,108.193 82.271,108.509 84.542,108.509 85.146,107.905 85.196,107.905 85.406,107.695 C11.1 85.482,107.569 C6.1 85.482,104.775 ; U4.3 85.482,103.364 85.482,104.775 ; v1(86.436,104.775) 85.482,104.775
  Bottom Layer w0.381: v1(86.436,104.775) 90.703,104.775 P2.1
AGND: B3.1 C14.2 C15.2 C23.2 C27.2 C30.2 C33.2 J2.1 J3.1 M1.2 M1.3 M1.5 M1.6 R13.5 R13.6 R13.7 R13.8 R14.2 R14.4 R21.1 U5.15 U5.19
  other v3: 86.797,71.216 86.797,72.733
CDC_ADCDAT: B1.31 U5.10 | length 5
  Top Layer w0.127: B1.31 75.739,84.256 76.716,83.279 U5.10@79.615,83.279
CDC_ADCLRC: B1.28 U5.11 | length 6.5
  Top Layer w0.127: v1(77.591,82.617) 77.926,82.617 78.24,82.931 78.972,82.931 79.129,82.774 U5.11
  Bottom Layer w0.127: v1(74.244,84.353) 75.007,84.353 76.683,82.677 v1@77.862,82.677
CDC_BCLK: B1.35 U5.7 | length 3.5
  Top Layer w0.127: B1.35 77.739,84.402 79.083,84.402 79.339,84.658 79.994,84.658 80.221,84.885 80.235,84.885 80.39,85.039 U5.7 U5.7@80.39,85.054
CDC_CSB: B1.42 R11.1 U5.26 | length 19.3
  Top Layer w0.127: B1.42 79.258,88.218 79.692,87.784 79.692,87.579 80.25,87.02 v1(80.264,87.02) ; U5.26 84.256,83.274 85.559,84.576 85.559,84.908 87.031,86.381 v1(87.046,86.381) ; R11.1 89.88,84.48 v1(90.526,84.48)
  Bottom Layer w0.127: v1(80.264,87.02) 80.907,86.378 82.63,86.378 82.976,86.723 83.753,86.723 84.393,86.084 84.82,86.084 84.988,85.916 86.581,85.916 v1(87.046,86.381) 87.046,86.385 87.051,86.381 88.625,86.381 v1(90.526,84.48)
CDC_DACDAT: B1.34 U5.8 | length 3.2
  Top Layer w0.127: B1.34 77.249,85.008 77.249,84.244 77.354,84.139 79.475,84.139 U5.8@79.615,84.279
CDC_DACLRC: B1.32 U5.9 | length 4.4
  Top Layer w0.127: B1.32 76.239,84.154 76.615,83.779 U5.9@79.615,83.779
CDC_MCLK: B1.36 U5.1 | length 8.3
  Top Layer w0.127: B1.36 78.643,85.018 78.725,85.101 78.831,85.101 v1(78.842,85.09) ; U5.1 83.39,85.184 83.489,85.283 83.489,85.287 83.718,85.517 84.557,85.517 84.455,85.415 v1(84.455,85.339)
  Bottom Layer w0.127: v1(78.842,85.09) 78.859,85.09 79.197,84.752 83.868,84.752 v1(84.455,85.339) v1@84.455,85.344
CDC_MODE: B1.38 R12.1 U5.25 | length 13.6
  Top Layer w0.127: B1.38 79.441,86.218 79.663,86.44 v1(79.791,86.44) ; R12.1 86.574,84.404 87.209,85.039 87.209,85.406 v1(87.3,85.496)
  Top Layer w0.254: U5.25@84.165,82.779 84.178,82.792 84.562,82.792 86.109,84.339 R12.1@86.109,84.658
  Bottom Layer w0.127: v1@79.806,86.44 79.851,86.44 80.168,86.124 82.735,86.124 83.081,86.469 83.648,86.469 84.288,85.83 84.715,85.83 85.048,85.496 v1(87.3,85.496)
CDONE: B1.7 R6.1 U2.11 | length 14.5
  Top Layer w0.127: B1.7 75.239,92.351 75.641,92.753 75.87,92.753 76.243,93.126 76.243,93.566 76.93,94.252 R6.1@77.089,94.093 ; v1(79.63,93.371) 79.577,93.424 79.243,93.424 79.116,93.55 78.115,93.55 77.43,94.234 R6.1 R6.1@77.089,94.093 ; v1(81.432,98.247) 81.432,98.313 82.14,99.02 82.764,99.02 U2.11 ; R6.1@77.089,94.093 77.23,93.951 76.948,93.951 R6.1@77.089,94.093
  Bottom Layer w0.127: v1(79.63,93.371) 79.731,93.371 80.493,94.132 80.493,97.307 v1(81.432,98.247)
FLASH_MEM_SS: B1.16 R3.1 U1.1 U2.1 | length 34.4
  Top Layer w0.127: v1(71.145,89.916) 71.22,89.916 71.423,89.713 71.806,89.713 ; U1.1@71.653,97.796 v1(71.653,101.092) ; v1@71.87,101.128 71.833,101.092 v1(71.653,101.092) ; R3.1 72.574,106.782 72.212,106.42 v1(72.212,102.489) 71.653,101.93 v1(71.653,101.092) ; U2.1 77.855,105.461 79.07,104.245 v1(79.07,103.48)
  Bottom Layer w0.127: v1(71.145,89.916) 71.134,89.916 70.503,90.548 70.503,91.901 72.017,93.415 72.017,95.656 73.439,97.079 73.439,99.57 72.894,100.116 72.894,100.583 72.384,101.092 v1(71.653,101.092) ; v1(72.212,102.489) 72.822,102.489 73.812,103.48 v1(79.07,103.48)
GND: B1.49 B2.2 B3.2 C1.1 C2.1 C6.2 C7.2 C9.2 C10.2 C11.2 J1.5 L1.2 L2.2 L3.2 OSC_1.2 P1.2 P2.2 U1.4 U2.14 U3.4 U4.1 U5.4
  other v1: 80.865,88.189 73.015,94.082
  other v3: 75.329,88.559
HOLD: R1.1 U1.7 U2.9 | length 17.9
  Top Layer w0.127: R1.1 74.051,106.756 73.689,106.395 73.689,106.223 72.923,105.457 72.923,104.896 72.923,103.403 74.344,101.983 v1(74.449,101.983) ; v1(79.4,101.016) 79.4,99.289 82.067,96.622 82.803,96.622 U2.9
  Bottom Layer w0.127: v1(74.449,101.983) 74.657,101.983 75.395,101.244 79.351,101.244 79.351,101.065 v1(79.4,101.016)
IO1: B1.13 P1.3 | length 11.5
  Top Layer w0.127: P1.3 70.95,99.332 70.95,97.579 70.172,96.801 70.172,94.179 70.426,93.925 70.426,93.089 70.823,92.692 70.841,92.692 71.798,91.735 71.798,91.295 71.831,91.262
IO2: B1.20 P1.6 | length 7.8
  Top Layer w0.127: P1.6 69.35,93.447 70.315,92.481 70.315,91.18 70.306,91.171 70.306,88.965 70.41,88.861 70.41,88.1 70.862,87.648 71.479,87.648 71.55,87.718 B1.20
IO3: B1.21 P1.7 | length 5.5
  Top Layer w0.127: P1.7 69.319,90.802 69.319,90.04 69.683,89.677 69.683,89.229 70.104,88.808 70.156,88.756 70.156,87.995 70.91,87.241 72.016,87.241 B1.21
IO4: B1.23 P1.8 | length 4
  Top Layer w0.127: P1.8 70.152,87.43 70.152,86.892 70.826,86.218 B1.23
IO5: B1.25 P1.9 | length 3.9
  Top Layer w0.127: P1.9 70.3,84.741 72.575,84.741 72.669,84.836
IO6: B1.26 P1.10 | length 4.8
  Top Layer w0.127: P1.10 70.295,84.367 73.05,84.367 73.255,84.571 73.255,84.76
IO7: B1.27 P1.11 | length 7.4
  Top Layer w0.127: P1.11 70.231,81.763 70.231,83.15 71.147,84.067 73.255,84.067 73.768,84.579 73.768,84.903 73.762,84.908 73.762,84.995 B1.27
IO8: B1.10 P2.3 | length 23.3
  Top Layer w0.127: v1(73.355,92.942) 73.739,92.558 B1.10
  Bottom Layer w0.127: v1(73.355,92.942) 81.48,101.067 P2.3
IO9: B1.9 P2.4 | length 21.6
  Top Layer w0.127: B1.9 74.262,91.942 74.262,92.879 v1(74.322,92.939)
  Bottom Layer w0.127: v1(74.322,92.939) 74.322,93.431 79.629,98.738 91.864,98.738 P2.4
IO10: B1.6 P2.5 | length 20
  Top Layer w0.127: B1.6 75.739,92.343 75.895,92.499 75.975,92.499 76.497,93.021 76.497,93.269 76.784,93.556 77.555,93.556 77.815,93.296 79.011,93.296 79.259,93.048 ; 79.259,93.048 79.951,92.356 86.12,92.356 88.233,94.47 88.233,95.511 88.562,95.839 89.636,95.839 89.784,95.987 P2.5
IO11: B1.4 P2.6 | length 18.8
  Top Layer w0.127: B1.4 76.739,92.238 77.076,92.575 77.191,92.575 77.657,93.042 78.906,93.042 79.865,92.083 86.317,92.083 88.487,94.253 88.487,94.748 88.741,95.002 88.741,95.153 88.816,95.228 90.294,95.228 P2.6
IO12: B1.3 P2.7 | length 16.2
  Top Layer w0.127: B1.3 77.239,92.238 77.789,92.788 78.801,92.788 79.76,91.829 83.939,91.829 84.76,91.008 v1(84.76,90.957)
  Bottom Layer w0.127: v1(84.76,90.957) 84.888,90.957 84.997,90.848 92.016,90.848 P2.7
IO13: B1.2 P2.8 | length 16.5
  Top Layer w0.127: B1.2 77.739,92.238 78.035,92.534 78.696,92.534 79.654,91.575 82.89,91.575 v1(83.617,90.848)
  Bottom Layer w0.127: v1(83.617,90.848) 84.803,89.662 90.78,89.662 P2.8
IO14: B1.48 P2.9 | length 15.4
  Top Layer w0.127: B1.48 82.104,91.218 83.025,90.297 v1(83.109,90.297)
  Bottom Layer w0.127: v1(83.109,90.297) 84.246,89.16 88.539,89.16 91.872,85.827 P2.9
IO15: B1.47 P2.10 | length 17.1
  Top Layer w0.127: B1.47 81.803,90.718 82.336,90.185 v1(82.336,90.195)
  Bottom Layer w0.127: v1(82.336,90.195) 82.336,90.031 82.429,90.124 83.755,88.798 87.757,88.798 92.075,84.48 P2.10
IO16: B1.46 P2.11 | length 18.9
  Top Layer w0.127: B1.46 81.486,90.218 v1(82.448,89.256)
  Bottom Layer w0.127: v1(82.448,89.256) 82.939,89.256 83.752,88.443 87.554,88.443 91.059,84.938 91.059,81.763 P2.11
LED: B1.44 R10.2 | length 16.3
  Top Layer w0.127: B1.44 79.399,89.218 79.893,89.713 v1(80.569,89.713) ; R10.2 80.823,95.275 81.543,94.556 81.974,94.556 v1(82.423,94.107) ; v1(83.464,88.036) 83.464,88.786 85.522,90.843 v1(85.522,91.592)
  Bottom Layer w0.127: v1(80.569,89.713) 80.918,89.713 82.344,88.286 82.521,88.286 82.687,88.12 83.38,88.12 v1(83.464,88.036) ; v1(82.423,94.107) 82.457,94.073 83.041,94.073 v1(85.522,91.592)
LEDCH: R8.2 U2.2 | length 6.6
  Top Layer w0.127: R8.2 74.347,108.306 75.082,107.57 75.082,106.299 75.362,106.02 75.87,106.02 76.239,105.651 76.239,104.635 76.683,104.191 U2.2
MainOSC: B1.37 OSC_1.3 | length 8
  Top Layer w0.127: B1.37 78.953,85.733 79.777,85.733 80.281,86.237 80.281,86.343 80.888,86.949 81.117,86.949 81.077,86.989 v1(81.077,87.02) ; v1(84.176,86.995) 84.269,86.995 84.624,87.35 84.624,87.917 OSC_1.3
  Bottom Layer w0.127: v1(81.077,87.02) 81.466,86.632 82.525,86.632 82.888,86.995 v1(84.176,86.995)
MICIN: R20.2 U5.22 | length 12.2
  Top Layer w0.254: R20.2@83.89,70.166 85.4,71.676 85.4,75.155 84.882,75.673 84.882,79.155 84.165,79.873 U5.22@84.165,81.279
NetB1_29: B1.29 C1.2 C2.2 R5.1 | length 8.5
  Top Layer w0.127: C2.2 71.223,80.518 70.866,80.518 70.485,80.899 70.485,82.538 70.957,83.01 72.167,83.01 72.647,83.49 R5.1@72.836,83.49 ; R5.1@72.836,83.363 73.198,83.724 73.768,83.724 73.901,83.858 74.443,83.858 74.735,84.15 74.735,85.014 B1.29
NetC23_1: C23.1 U5.20 | length 2.2
  Top Layer w0.254: U5.20@82.89,80.504 82.89,80.065 83.711,79.244 84.009,78.814 C23.1@84.06,78.74
NetC24_1: C24.1 U5.14 | length 7.5
  Top Layer w0.254: C24.1@73.33,82.019 73.569,81.78 73.569,81.162 74.06,80.67 77.495,80.67 78.104,81.279 U5.14@79.615,81.279
NetC24_2: C24.2 R13.4 R15.1 | length 25.1
  Top Layer w0.254: v1(69.393,77.978) 72.982,77.978 73.33,78.326 C24.2@73.33,79.169 ; v1(69.524,71.831) 69.617,71.831 69.841,71.607 76.871,71.607 78.66,73.397 R13.4
  Bottom Layer w0.254: v1(69.524,71.831) 69.063,71.371 69.063,70.776 R15.1 69.001,77.586 v1(69.393,77.978) ; v1(69.393,77.978) 69.524,78.109 69.262,78.109 v1(69.393,77.978)
NetC25_1: C25.1 U5.13 | length 4.2
  Top Layer w0.254: C25.1@75.54,82.045 77.798,82.045 78.064,81.779 U5.13@79.615,81.779
NetC25_2: C25.2 R13.3 R16.1 | length 24.1
  Top Layer w0.254: v1(70.079,76.987) 70.172,76.987 70.4,77.216 74.729,77.216 75.54,78.027 C25.2@75.54,79.195 ; v1(71.78,72.161) 76.842,72.161 78.864,74.183 79.665,74.183 79.962,73.886 79.962,73.424 R13.3
  Bottom Layer w0.254: v1(70.079,76.987) 70.079,75.187 72.632,72.634 72.632,72.434 R16.1@72.93,72.136 ; v1(71.78,72.161) 71.806,72.136 R16.1@72.93,72.136 ; R16.1 R16.1@72.93,72.136
NetC26_1: C26.1 C27.1 R14.7 R14.8 | length 4.2
  Top Layer w0.254: C26.1 87.035,80.366 C27.1 87.122,79.183 87.667,79.183 87.808,79.324 87.859,79.324 87.971,79.436 88.189,79.436 ; R14.8 88.743,79.287 88.338,79.287 88.189,79.436 ; R14.7 88.338,79.789 88.189,79.641 88.189,79.436
NetC26_2: C26.2 U5.23 | length 2.4
  Top Layer w0.254: U5.23@84.165,81.779 84.849,81.779 85.141,81.487 85.141,80.863 85.29,80.714 85.336,80.714 85.609,80.441 C26.2
NetC28_1: C28.1 U5.17 | length 2
  Top Layer w0.254: C28.1@80.685,78.754 81.39,79.459 U5.17@81.39,80.504
NetC28_2: C28.2 R13.1 R17.1 | length 5.6
  Top Layer w0.254: C28.2@80.685,77.354 81.001,77.038 81.001,74.408 81.039,74.37 ; R13.1 81.039,74.37 ; R17.1 82.042,73.566 81.744,73.864 81.544,73.864 81.039,74.37
NetC29_1: C29.1 U5.24 | length 2.2
  Top Layer w0.254: U5.24@84.165,82.279 85.285,82.279 85.623,81.94 C29.1
NetC29_2: C29.2 C30.1 R14.5 R14.6 | length 5.2
  Top Layer w0.254: C29.2@87.397,82.263 C29.2@87.67,81.99 ; C30.1@87.397,83.483 87.67,83.21 C30.1 C29.2@87.67,81.99 ; R14.6 88.287,80.289 88.138,80.438 88.138,80.667 ; R14.5 88.767,80.816 88.287,80.816 88.138,80.667 ; C29.2 C29.2@87.67,81.99 ; C29.2 C29.2@87.67,81.99 ; C29.2 87.67,81.136 88.138,80.667
NetC31_1: C31.1 U5.16 | length 2.6
  Top Layer w0.254: C31.1@79.324,78.729 79.554,78.729 79.554,78.817 80.888,80.152 80.888,80.502 U5.16@80.89,80.504
NetC31_2: C31.2 R13.2 R18.1 | length 10.1
  Top Layer w0.254: C31.2@79.324,77.329 80.137,76.516 v1(80.137,74.778) 80.489,74.426 R13.2 ; R18.1 84.009,73.341 v1(84.201,73.533)
  Bottom Layer w0.254: v1(80.137,74.778) 80.137,74.625 81.229,73.533 v1(84.201,73.533)
NetC32_1: C32.1 R20.1 | length 1.9
  Top Layer w0.254: C32.1 80.131,70.506 80.871,70.506 R20.1@81.45,69.926
NetC32_2: C32.2 C33.1 M1.1 R21.2 | length 4.3
  Top Layer w0.254: C33.1 78.74,69.379 C32.2 79.923,69.313 R21.2 79.852,68.123 79.554,67.825 M1.1
NetJ2_2: J2.2 R14.3 | length 6.1
  Top Layer w0.254: R14.3 90.703,80.289 91.686,79.307 J2.2
NetJ2_3: J2.3 R14.1 | length 15.9
  Top Layer w0.254: J2.3 86.066,68.032 89.433,71.399 89.433,77.194 90.889,78.649 90.889,79.114 90.763,79.239 R14.1
NetJ3_2: J3.2 R16.2 | length 4.7
  Top Layer w0.254: v1(76.138,73.457) 76.532,73.851 76.532,75.01 J3.2
  Bottom Layer w0.254: R16.2 74.905,72.161 74.905,73.003 75.053,73.152 75.816,73.152 76.121,73.457 v1(76.138,73.457)
NetJ3_3: J3.3 R15.2 | length 5.7
  Top Layer w0.254: J3.3 71.494,68.083 v1(72.187,68.775)
  Bottom Layer w0.254: R15.2 70.801,70.017 71.171,69.647 71.755,69.647 72.179,69.223 72.179,68.783 v1(72.187,68.775)
NetL1_1: L1.1 R8.1 | length 1.6
  Top Layer w0.127: R8.1 72.187,108.418 L1.1
NetL2_1: L2.1 R9.1 | length 3
  Top Layer w0.127: L2.1@89.408,109.88 89.408,109.217 89.967,108.658 89.967,107.521 90.148,107.34 R9.1
NetL3_1: L3.1 R10.1 | length 1.4
  Top Layer w0.254: R10.1 83.73,95.275 L3.1
NetR2_1: R2.1 U1.3 | length 6.1
  Top Layer w0.127: U1.3@74.193,97.796 74.193,97.432 74.412,97.213 74.6,97.213 75.306,96.507 75.651,96.507 76.07,96.088 76.844,96.088 76.852,96.08 78.251,96.08 78.472,95.859 78.472,95.688 78.834,95.326 R2.1
NetR15_3: R15.3 R17.2 | length 9.8
  Top Layer w0.254: v1(80.797,71.323) 81.799,71.323 R17.2
  Bottom Layer w0.254: R15.3 80.188,70.714 v1(80.797,71.323)
NetR16_3: R16.3 R18.2 | length 8.9
  Top Layer w0.254: R18.2 84.096,71.541 84.234,71.679 v1(84.328,71.679)
  Bottom Layer w0.254: R16.3 83.871,72.136 v1(84.328,71.679)
RESET_FPGA: B1.8 B2.1 R4.1 U2.10 | length 31
  Top Layer w0.254: B1.8 74.739,92.45 75.532,93.243 v1(75.667,93.243) ; U2.10 83.82,97.841 84.353,97.307 84.886,97.307 v1(84.962,97.384) ; R4.1 86.857,91.415 v1(88.316,91.415) 89.078,92.177 B2.1 89.859,93.907 90.059,94.107 v1(90.068,94.107)
  Bottom Layer w0.127: v1(75.667,93.243) 75.715,93.243 77.654,91.305 82.791,91.305 82.934,91.448 84.973,91.448 85.319,91.102 87.935,91.102 88.248,91.415 v1@88.29,91.415
  Bottom Layer w0.254: v1(84.962,97.384) 84.962,95.835 86.766,94.031 89.992,94.031 v1(90.068,94.107) ; v1@88.29,91.415 v1(88.316,91.415)
RXD: B1.19 P1.5 U2.8 | length 23.4
  Top Layer w0.127: v1(70.46,98.12) 69.215,96.876 P1.5 69.215,95.809 69.839,95.185 69.839,94.153 70.172,93.82 70.172,92.984 70.569,92.587 70.569,91.075 70.56,91.066 70.56,89.688 70.664,89.584 70.664,88.206 70.968,87.902 71.374,87.902 71.691,88.218 B1.19 ; v1(72.212,99.568) 72.568,99.924 74.193,99.924 v1(74.549,100.279) ; v1(75.006,99.238) 75.006,98.984 75.128,98.862 75.692,98.862 76.2,98.354 76.2,97.837 76.378,97.659 76.378,97.104 76.763,96.719 76.779,96.719 76.927,96.571 U2.8
  Bottom Layer w0.127: v1(70.46,98.12) 70.411,98.169 70.411,98.274 71.704,99.568 v1(72.212,99.568) ; v1(74.549,100.279) 75.006,99.822 v1(75.006,99.238)
SPI_MISO: B1.17 U1.2 U2.4 | length 19.4
  Top Layer w0.127: v1(71.171,89.129) 71.73,89.129 71.831,89.23 ; U1.2@72.923,97.796 U1.2 72.949,99.154 v1@73.08,99.285 ; v1(72.949,99.365) 74.328,99.365 76.564,101.601 77.405,101.601 U2.4
  Bottom Layer w0.127: v1(71.171,89.129) 70.249,90.051 70.249,92.008 71.763,93.523 71.763,98.179 v1(72.949,99.365)
SPI_MOSI: B1.14 U1.5 U2.3 U5.27 | length 39.5
  Top Layer w0.127: v1(71.247,91.592) 71.336,91.504 71.336,91.102 71.423,91.014 71.719,90.718 71.78,90.718 ; U1.5@75.463,104.896 75.463,103.156 75.647,102.973 v1(75.647,102.845) 75.685,102.883 77.417,102.883 U2.3 ; U5.27 84.256,83.774 85.305,84.822 85.305,85.536 86.106,86.337 v1(86.106,86.406)
  Bottom Layer w0.127: v1(75.647,102.845) 74.617,102.845 73.83,102.057 73.83,99.898 73.947,99.781 73.947,96.868 72.525,95.446 72.525,92.87 v1(71.247,91.592) 76.648,91.592 79.282,88.959 81.313,88.959 82.405,87.866 82.63,87.866 82.95,87.546 83.668,87.546 83.861,87.739 84.773,87.739 86.101,86.411 v1@86.106,86.411
SPI_SCK: B1.15 U1.6 U2.5 U5.28 | length 42.7
  Top Layer w0.127: v1(71.05,90.694) 71.061,90.694 71.534,90.221 71.857,90.221 ; v1(73.203,101.168) 74.328,101.168 75.326,102.166 75.326,102.403 75.336,102.413 ; U1.6@74.193,104.896 74.219,104.871 74.219,103.53 75.336,102.413 ; U2.5 77.855,100.381 78.345,100.871 78.345,101.854 77.845,102.354 75.395,102.354 75.336,102.413 ; U5.28 84.24,84.274 85.051,85.085 85.051,85.641 85.192,85.782 v1(85.192,86.406)
  Bottom Layer w0.127: v1(71.05,90.694) 71.05,90.8 70.757,91.094 70.757,91.796 72.271,93.31 72.271,95.551 73.693,96.974 73.693,99.676 73.203,100.166 v1(73.203,101.168) ; v1@71.196,90.5 71.29,90.406 74.648,90.406 76.35,88.705 81.098,88.705 82.19,87.612 82.525,87.612 82.845,87.292 83.773,87.292 83.966,87.485 84.379,87.485 85.187,86.677 85.187,86.411 v1@85.192,86.411
TXD: B1.18 P1.4 U2.7 | length 25.1
  Top Layer w0.127: v1(71.171,88.392) 71.212,88.392 71.538,88.718 B1.18 ; v1(72.303,100.381) 73.4,100.381 73.934,100.914 v1(75.032,100.914) ; v1(75.883,99.644) 75.883,99.031 77.072,97.841 U2.7
  Bottom Layer w0.127: v1(71.171,88.392) 70.063,89.5 69.292,89.5 68.274,90.517 68.274,93.836 69.155,94.717 69.275,94.717 70.156,95.597 70.156,97.586 P1.4 71.069,100.381 v1(72.303,100.381) ; v1(75.032,100.914) 75.103,100.843 75.103,100.424 v1(75.883,99.644)
USB_D_N: J1.2 U2.13 | length 6.9
  Top Layer w0.381: J1.2 81.295,102.144 81.788,101.651 U2.13
USB_D_P: J1.3 R7.1 U2.12 | length 12.1
  Top Layer w0.381: v1(80.005,104.115) 80.543,104.115 80.645,104.013 ; J1.3 80.645,104.013 ; U2.12 81.432,100.381 80.645,101.168 80.645,104.013
  Bottom Layer w0.381: v1(80.005,104.115) 80.924,104.115 81.469,104.659 R7.1
pads on no net: B1.11 B1.12 B1.39 B1.40 B1.41 B1.43 B1.45 J1.4 J1.M1 J1.M2 J1.S1 J1.S2 J1.S3 J1.S4 J2.None J3.None U2.6 U5.2 U5.6 U5.21 U5.29
copper on no net:
  other v2: 80.79,81.674 81.89,81.674 82.99,81.674 80.79,82.774 81.89,82.774 82.99,82.774 80.79,83.874 81.89,83.874 82.99,83.874

## Polygon pours and split planes (outlines as drawn)
GND on Bottom Layer "GND_L02_P007" (solid, remove dead copper, pour order 7): 69.215,63.602 cw(c69.215,64.872) 67.945,64.872 67.945,109.957 cw(c69.215,109.957) 69.215,111.227 92.075,111.227 cw(c92.075,109.957) 93.345,109.957 93.345,64.872 cw(c92.075,64.872) 92.075,63.602
AGND on Bottom Layer "AGND_L02_P003" (solid, remove dead copper, pour order 3): 67.945,78.109 78.33,78.109 78.33,84.709 93.345,84.709 93.345,64.872 92.075,63.602 69.262,63.602 67.945,64.999
GND on Top Layer "GND_L01_P006" (solid, pour order 6): 69.215,63.602 cw(c69.215,64.872) 67.945,64.872 67.945,109.957 cw(c69.215,109.957) 69.215,111.227 92.075,111.227 cw(c92.075,109.957) 93.345,109.957 93.345,64.872 cw(c92.075,64.872) 92.075,63.602
AGND on Top Layer "AGND_L01_P005" (solid, remove dead copper, pour order 5): 67.945,78.109 78.33,78.109 78.33,84.709 93.345,84.709 93.345,64.872 92.075,63.602 69.262,63.602 67.945,64.999

## Other copper
Top Layer:
  region: 88.791,79.239
  region: 88.791,79.239

## Silkscreen, mask and mechanical layers (free items; w line width, h text height)
Top Overlay:
  region: 92.05,72.085 91.338,72.085 92.05,72.796
  region: 92.05,72.085 92.761,72.085 92.05,72.796
  region: 69.19,70.866 68.478,70.866 69.19,70.155
  region: 69.19,70.866 69.901,70.866 69.19,70.155
  lines w0.254: 69.19,70.866 69.19,73.609 ; 92.05,69.342 92.05,72.085
  text "PROG" at 74.869,109.982 h0.51 r270
  text "ON" at 86.589,109.372 h0.51 r90
  text "3V3" at 68.504,107.264 h0.51
  text "5V" at 91.542,107.172 h0.51
  text "GND" at 91.542,104.632 h0.51
  text "GND" at 68.613,104.572 h0.51
  text "IO1" at 68.682,102.092 h0.51
  text "IO1" at 91.542,102.092 h0.51
  text "TXD" at 68.682,99.552 h0.51
  text "IO1" at 91.542,99.552 h0.51
  text "IO10" at 91.198,97.014 h0.51
  text "RXD" at 68.682,96.986 h0.51
  text "IO2" at 68.682,94.472 h0.51
  text "IO11" at 91.198,94.474 h0.51
  text "IO3" at 68.682,91.932 h0.51
  text "IO12" at 91.198,91.934 h0.51
  text "IO4" at 68.682,89.392 h0.51
  text "IO13" at 91.198,89.394 h0.51
  text "IO5" at 68.682,86.852 h0.51
  text "IO14" at 91.198,86.854 h0.51
  text "IO6" at 68.682,84.312 h0.51
  text "IO15" at 91.198,84.314 h0.51
  text "IO7" at 68.682,81.772 h0.51
  text "IO16" at 91.198,81.774 h0.51
Bottom Overlay:
  circle w0.254: c84.176,71.12 r1.568
  circle w0.254: c80.569,71.12 r1.029
  circle w0.254: c76.2,71.12 r2.443
  region: 82.626,71.12 82.702,71.552 82.931,72.136 83.312,72.517 83.591,72.517 83.693,72.619 84.709,72.619 84.836,72.492 84.938,72.492 85.743,71.686 85.743,70.681 85.522,70.46 85.522,70.307 84.912,69.698 84.684,69.698 84.557,69.571 83.591,69.571 82.88,70.282 82.855,70.282
  region: 79.553,71.12 79.68,71.247 79.68,71.679 80.035,72.034 80.874,72.034 80.95,71.958 81.077,71.958 81.597,71.438 81.597,70.777 80.95,70.129 80.112,70.129 79.807,70.434
  region: 73.965,71.425
  region: 73.66,71.12 73.838,71.577 73.965,72.238 74.828,73.101 74.828,73.127 74.93,73.127 75.286,73.482 76.606,73.482 76.632,73.508 76.683,73.457 77.114,73.457 77.495,73.076 77.673,73.076 78.105,72.644 78.105,72.568 78.334,72.339 78.334,72.263 78.486,72.111 78.486,71.73 78.588,71.628 78.588,71.298 78.638,71.247 78.638,70.561 78.588,70.51 78.588,70.206 78.257,69.875 78.257,69.799 77.343,68.885 77.038,68.885 76.835,68.682 75.794,68.682 75.692,68.783 75.336,68.783 75.057,69.063 74.828,69.063 74.244,69.647 74.244,69.799 74.092,69.952
  lines w0.254: 74.041,71.12 85.522,71.12
  text "RocketFPGA" at 74.574,65.938 h1.52
  text "By PGS and LSV" at 75.26,64.567 h0.76
BorderOutline:
  lines w0.127: 67.945,64.872 ccw(c69.215,64.872) 69.215,63.602 ; 67.945,109.957 cw(c69.215,109.957) 69.215,111.227 ; 92.075,63.602 ccw(c92.075,64.872) 93.345,64.872 ; 92.075,111.227 cw(c92.075,109.957) 93.345,109.957

## Text inside footprints (layer, text, board x,y; h text height)
J1: Mechanical 1 "PCB Edge" at 82.045,112.057 h0.76 r180